# EAGLE board ATmega128RFA1-DevBoard-Panel-v23 (EAGLE 6.4), part 1 of 2
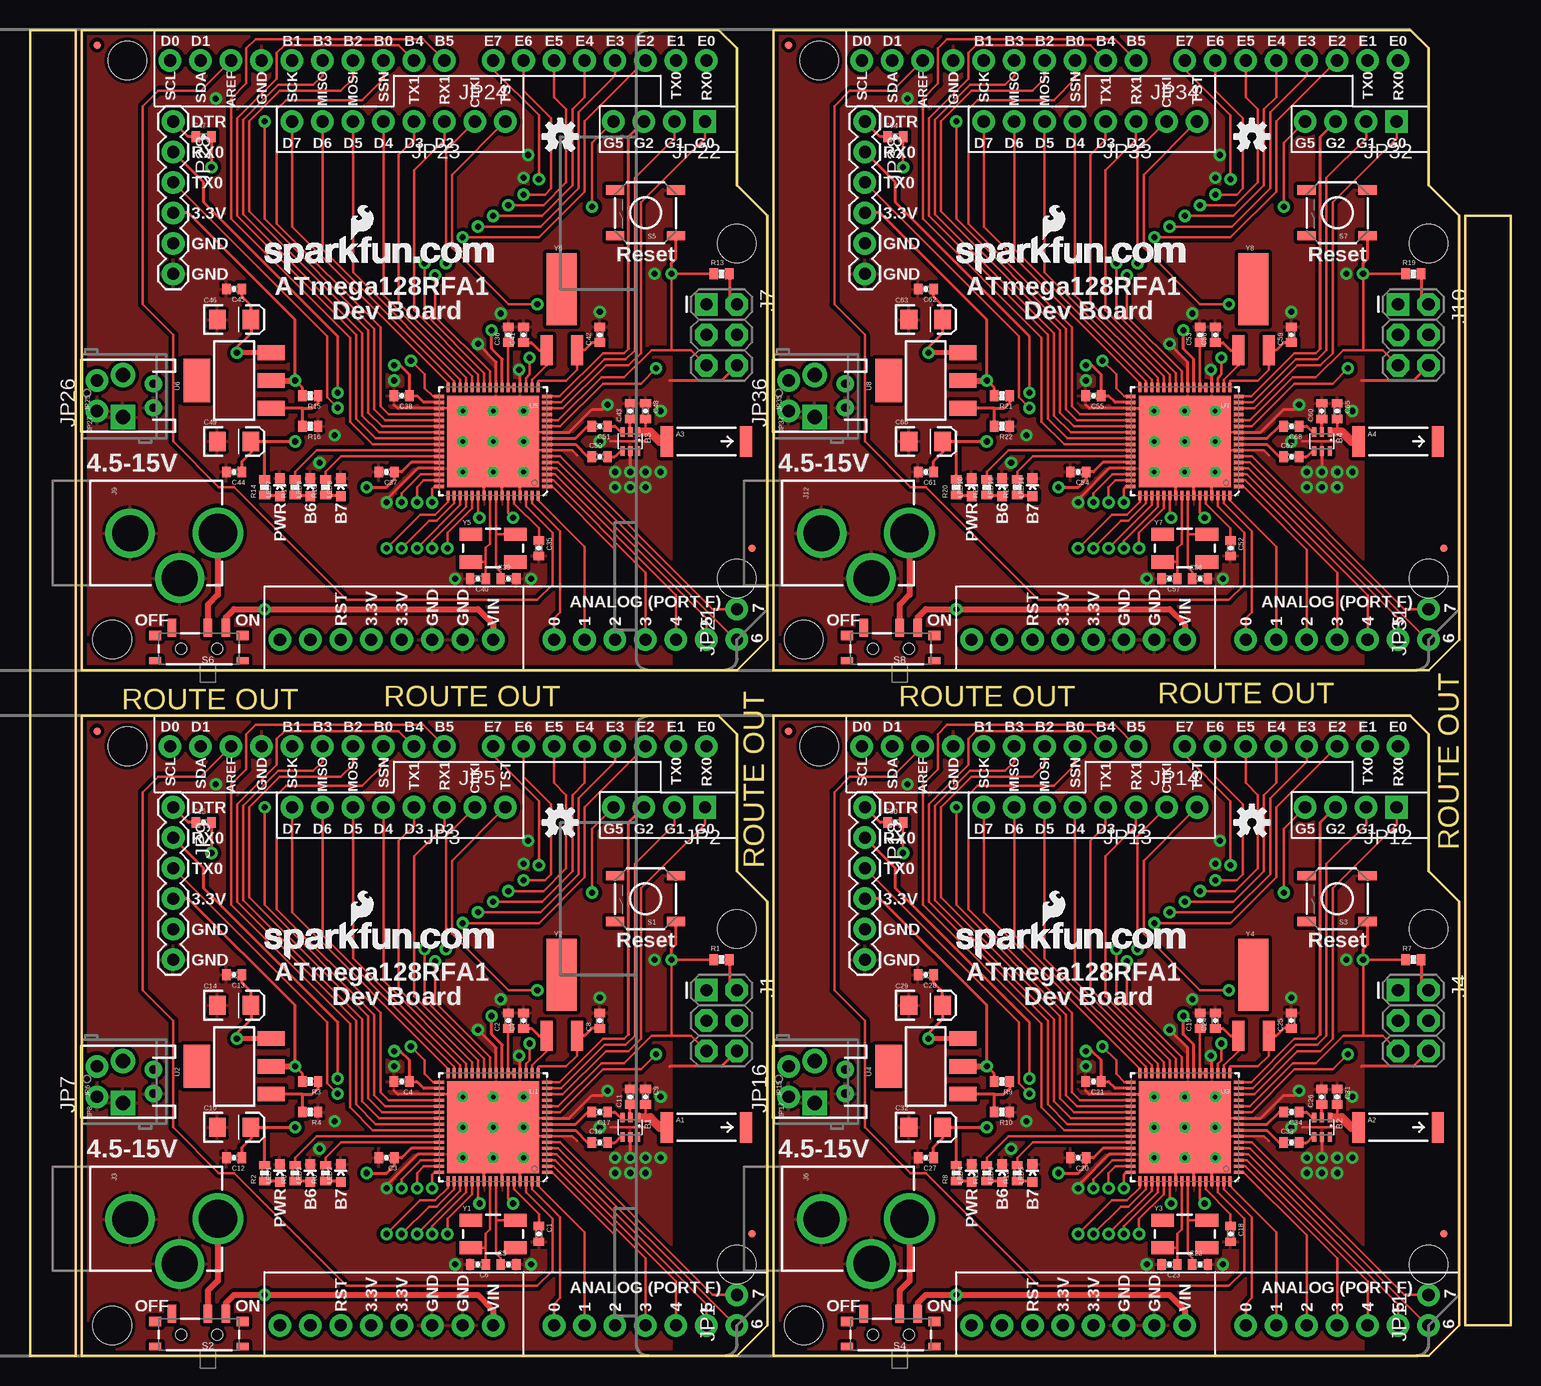
[diagram p0: board, top side]
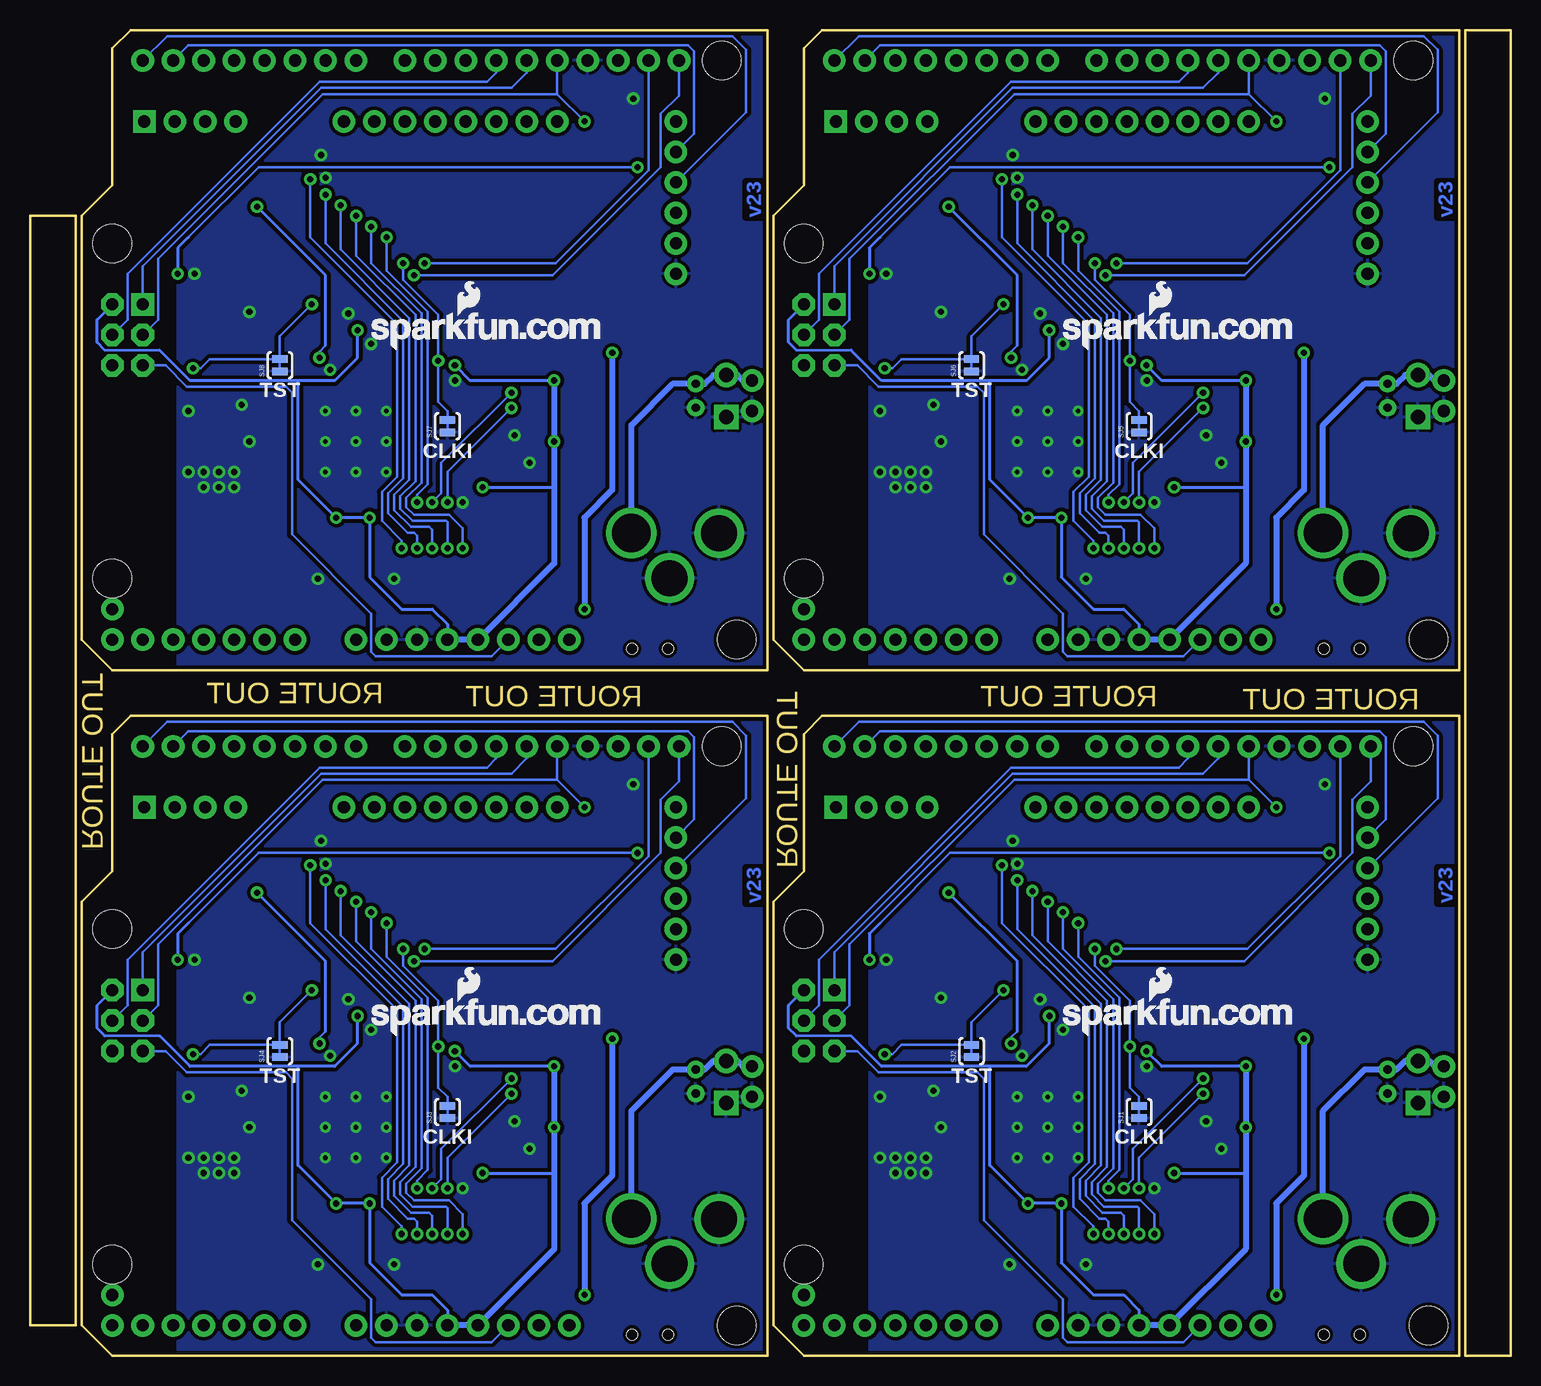
[diagram p1: board, bottom side, seen from below]

Size 123.44 x 110.49 mm. Coordinates in mm from the lower left corner, seen from the top.
Outline: 3.81,88.9 3.81,0 0,0 0,22.86
Outline: 123.44,88.9 123.44,2.54 119.63,2.54 119.63,22.86
Outline: 119.63,6.1 119.63,95 123.44,95 123.44,72.14
Outline: 0,107.95 0,88.9
Outline: 0,88.9 0,21.59
Outline: 0,88.9 0,110.49 3.81,110.49 3.81,87.63
Outline: 4.32,53.34 4.32,0 58.93,0 61.47,2.54 61.47,37.85 58.93,40.39 58.93,51.82 57.4,53.34 4.32,53.34
Outline: 61.98,53.34 61.98,0 116.59,0 119.13,2.54 119.13,37.85 116.59,40.39 116.59,51.82 115.06,53.34 61.98,53.34
Outline: 4.32,110.49 4.32,57.15 58.93,57.15 61.47,59.69 61.47,95 58.93,97.54 58.93,108.97 57.4,110.49 4.32,110.49
Outline: 61.98,110.49 61.98,57.15 116.59,57.15 119.13,59.69 119.13,95 116.59,97.54 116.59,108.97 115.06,110.49 61.98,110.49
Copper layers (1*16): Top 0.035mm / dielectric 1.5mm / Bottom 0.035mm
Design rules "SparkFun": minimum track width 7mil, minimum drill 15mil, track to track 8mil, track to pad 8mil, pad to pad 8mil, via to via 8mil, smd to smd 8mil, copper to edge 8mil, drill to drill 8mil, minimum pad ring 12mil, minimum via ring 10mil, stop-mask expansion 4mil, vias tented up to drill 20mil, thermal gap 10mil

## Footprints (pad centres in the part's own frame; a part is rotated, then mirrored left to right if it is on the bottom)
ANTENNA-CHIP5 = smd 1.016 x 2.54: FEED -3.302,0; NC 3.302,0
BALUN = smd 0.35 x 0.8: 1 -0.65,-0.8; 2 0,-0.8; 3 0.65,-0.8; 4 0.65,0.8; 5 0,0.8; 6 -0.65,0.8
0402-CAP = smd 0.7 x 0.9: 1 -0.65,0; 2 0.65,0
EIA3216 = smd 1.4 x 1.6: A 1.4,0; C -1.4,0
MICRO-FIDUCIAL = smd 0.635 x 0.635: 1 0,0
2X3-NS = drill 1.016 pad 1.88 square: 1 -2.54,-1.27 | drill 1.016 pad 1.88 octagon: 2 -2.54,1.27; 3 0,-1.27; 4 0,1.27; 5 2.54,-1.27; 6 2.54,1.27
ARDUINO_UNO_R3 = drill 1.016 pad 1.88: 3.3V 35.56,2.54; 5V 38.1,2.54; A0 50.8,2.54; A1 53.34,2.54; A2 55.88,2.54; A3 58.42,2.54; A4 60.96,2.54; A5 63.5,2.54; AREF 23.876,50.8; D2 58.42,50.8; D3 55.88,50.8; D4 53.34,50.8; D5 50.8,50.8; D6 48.26,50.8; D7 45.72,50.8; D8 41.656,50.8; D9 39.116,50.8; D10 36.576,50.8; D11 34.036,50.8; D12 31.496,50.8; D13 28.956,50.8; GND@0 40.64,2.54; GND@1 43.18,2.54; GND@2 26.416,50.8; IOREF 30.48,2.54; NC 27.94,2.54; RES 33.02,2.54; RX 63.5,50.8; SCL 18.796,50.8; SDA 21.336,50.8; TX 60.96,50.8; VIN 45.72,2.54 | hole 3.2: 15.24,50.8; 13.97,2.54; 66.04,7.62; 66.04,35.56
POWER_JACK_PTH_LOCK = drill 2.997 pad 4.115: GND 0.025,6.557; GNDBREAK 3.762,10.7 | drill 3.2 pad 4.115: PWR 0,13.878
1X02_NO_SILK = drill 1.016 pad 1.88: 1 0,0; 2 2.54,0
1X04_NO_SILK = drill 1.016 pad 1.88 square: 1 0,0 | drill 1.016 pad 1.88: 2 2.54,0; 3 5.08,0; 4 7.62,0
1X06_NS = drill 1.016 pad 1.88: 1 0,0; 2 2.54,0; 3 5.08,0; 4 7.62,0; 5 10.16,0; 6 12.7,0
JST-2-PTH = drill 0.7 pad 1.448: 1 -1,0; 2 1,0
SCREWTERMINAL-3.5MM-2-NS = drill 1.2 pad 2.032 square: 1 0,0 | drill 1.2 pad 2.032: 2 3.5,0
FTDI_BASIC = drill 1.016 pad 1.88: CTS 10.16,0; DTR 0,0; GND 12.7,0; RXI 2.54,0; TXO 5.08,0; VCC 7.62,0
LED-0603 = smd 0.8 x 0.8: A 0,-0.75; C 0,0.75
0402-RES = smd 0.7 x 0.9: 1 -0.65,0; 2 0.65,0
TACTILE_SWITCH_SMD = smd 1.524 x 0.762: 1 -2.54,1.905; 2 2.54,1.905; 3 -2.54,-1.905; 4 2.54,-1.905
SWITCH-SPST-SMD-A = smd 0.7 x 1.5: 1 -2.25,-1.75; 2 -0.75,-1.75; 3 2.25,-1.75 | smd 1 x 0.6: GND1 -3.65,1; GND3 3.65,1 | smd 1 x 0.8: GND2 -3.65,-1.1; GND4 3.65,-1.1 | hole 0.9: -1.5,0; 1.5,0
SJ_2S-TRACE = smd 0.635 x 1.27: 1 -0.508,0; 2 0.508,0
QFN-64 = smd 0.8 x 0.28: 1 -4.5,3.75; 2 -4.5,3.25; 3 -4.5,2.75; 4 -4.5,2.25; 5 -4.5,1.75; 6 -4.5,1.25; 7 -4.5,0.75; 8 -4.5,0.25; 9 -4.5,-0.25; 10 -4.5,-0.75; 11 -4.5,-1.25; 12 -4.5,-1.75; 13 -4.5,-2.25; 14 -4.5,-2.75; 15 -4.5,-3.25; 16 -4.5,-3.75; 33 4.5,-3.75; 34 4.5,-3.25; 35 4.5,-2.75; 36 4.5,-2.25; 37 4.5,-1.75; 38 4.5,-1.25; 39 4.5,-0.75; 40 4.5,-0.25; 41 4.5,0.25; 42 4.5,0.75; 43 4.5,1.25; 44 4.5,1.75; 45 4.5,2.25; 46 4.5,2.75; 47 4.5,3.25; 48 4.5,3.75 | smd 0.28 x 0.8: 17 -3.75,-4.5; 18 -3.25,-4.5; 19 -2.75,-4.5; 20 -2.25,-4.5; 21 -1.75,-4.5; 22 -1.25,-4.5; 23 -0.75,-4.5; 24 -0.25,-4.5; 25 0.25,-4.5; 26 0.75,-4.5; 27 1.25,-4.5; 28 1.75,-4.5; 29 2.25,-4.5; 30 2.75,-4.5; 31 3.25,-4.5; 32 3.75,-4.5; 49 3.75,4.5; 50 3.25,4.5; 51 2.75,4.5; 52 2.25,4.5; 53 1.75,4.5; 54 1.25,4.5; 55 0.75,4.5; 56 0.25,4.5; 57 -0.25,4.5; 58 -0.75,4.5; 59 -1.25,4.5; 60 -1.75,4.5; 61 -2.25,4.5; 62 -2.75,4.5; 63 -3.25,4.5; 64 -3.75,4.5 | smd 7.65 x 7.65: 65 0,0
SOT223 = smd 1.219 x 2.235: 1 -2.311,-3.099; 2 0,-3.099; 3 2.311,-3.099 | smd 3.6 x 2.2: 4 0,3.099
CRYSTAL-SMD-5X3 = smd 1.9 x 1.1: 1 -1.85,-1.15; 2 1.85,-1.15; 3 1.85,1.15; 4 -1.85,1.15
CRYSTAL-32KHZ-SMD = smd 2.5 x 6: SHEILD 0,5.08 | smd 1 x 2.5: X1 -1.27,0; X2 1.27,0

## Placement (x,y rotation side)
A1  ANTENNA2SMD5  [ANTENNA-CHIP5]  56.39,19.05 0 top
A2  ANTENNA2SMD5  [ANTENNA-CHIP5]  114.05,19.05 0 top
A3  ANTENNA2SMD5  [ANTENNA-CHIP5]  56.39,76.2 0 top
A4  ANTENNA2SMD5  [ANTENNA-CHIP5]  114.05,76.2 0 top
B1  748421245  [BALUN]  50.04,19.05 180 top
B2  748421245  [BALUN]  107.7,19.05 180 top
B3  748421245  [BALUN]  50.04,76.2 180 top
B4  748421245  [BALUN]  107.7,76.2 180 top
C1  1uF  [0402-CAP]  42.42,10.16 270 top
C2  1uF  [0402-CAP]  39.88,27.94 90 top
C3  1uF  [0402-CAP]  29.72,16.51 180 top
C4  1uF  [0402-CAP]  30.99,22.86 180 top
C5  12pF  [0402-CAP]  39.88,7.62 0 top
C6  12pF  [0402-CAP]  37.34,7.62 180 top
C7  12pF  [0402-CAP]  41.15,27.94 90 top
C8  12pF  [0402-CAP]  47.5,27.94 90 top
C9  0.75pF  [0402-CAP]  51.31,21.59 270 top
C10  10uF  [EIA3216]  17.02,19.05 0 top
C11  22pF  [0402-CAP]  50.04,21.59 90 top
C12  1uF  [0402-CAP]  17.02,16.51 180 top
C13  0.1uF  [0402-CAP]  17.02,31.75 180 top
C14  10uF  [EIA3216]  17.02,29.21 0 top
C15  0.1uF  [0402-CAP]  14.48,44.45 0 top
C16  JUMP  [0402-CAP]  47.5,17.78 0 top
C17  JUMP  [0402-CAP]  47.5,20.32 180 top
C18  1uF  [0402-CAP]  100.08,10.16 270 top
C19  1uF  [0402-CAP]  97.54,27.94 90 top
C20  1uF  [0402-CAP]  87.38,16.51 180 top
C21  1uF  [0402-CAP]  88.65,22.86 180 top
C22  12pF  [0402-CAP]  97.54,7.62 0 top
C23  12pF  [0402-CAP]  95,7.62 180 top
C24  12pF  [0402-CAP]  98.81,27.94 90 top
C25  12pF  [0402-CAP]  105.16,27.94 90 top
C26  22pF  [0402-CAP]  107.7,21.59 90 top
C27  1uF  [0402-CAP]  74.68,16.51 180 top
C28  0.1uF  [0402-CAP]  74.68,31.75 180 top
C29  10uF  [EIA3216]  74.68,29.21 0 top
C30  0.1uF  [0402-CAP]  72.14,44.45 0 top
C31  0.75pF  [0402-CAP]  108.97,21.59 270 top
C32  10uF  [EIA3216]  74.68,19.05 0 top
C33  JUMP  [0402-CAP]  105.16,17.78 0 top
C34  JUMP  [0402-CAP]  105.16,20.32 180 top
C35  1uF  [0402-CAP]  42.42,67.31 270 top
C36  1uF  [0402-CAP]  39.88,85.09 90 top
C37  1uF  [0402-CAP]  29.72,73.66 180 top
C38  1uF  [0402-CAP]  30.99,80.01 180 top
C39  12pF  [0402-CAP]  39.88,64.77 0 top
C40  12pF  [0402-CAP]  37.34,64.77 180 top
C41  12pF  [0402-CAP]  41.15,85.09 90 top
C42  12pF  [0402-CAP]  47.5,85.09 90 top
C43  22pF  [0402-CAP]  50.04,78.74 90 top
C44  1uF  [0402-CAP]  17.02,73.66 180 top
C45  0.1uF  [0402-CAP]  17.02,88.9 180 top
C46  10uF  [EIA3216]  17.02,86.36 0 top
C47  0.1uF  [0402-CAP]  14.48,101.6 0 top
C48  0.75pF  [0402-CAP]  51.31,78.74 270 top
C49  10uF  [EIA3216]  17.02,76.2 0 top
C50  JUMP  [0402-CAP]  47.5,74.93 0 top
C51  JUMP  [0402-CAP]  47.5,77.47 180 top
C52  1uF  [0402-CAP]  100.08,67.31 270 top
C53  1uF  [0402-CAP]  97.54,85.09 90 top
C54  1uF  [0402-CAP]  87.38,73.66 180 top
C55  1uF  [0402-CAP]  88.65,80.01 180 top
C56  12pF  [0402-CAP]  97.54,64.77 0 top
C57  12pF  [0402-CAP]  95,64.77 180 top
C58  12pF  [0402-CAP]  98.81,85.09 90 top
C59  12pF  [0402-CAP]  105.16,85.09 90 top
C60  22pF  [0402-CAP]  107.7,78.74 90 top
C61  1uF  [0402-CAP]  74.68,73.66 180 top
C62  0.1uF  [0402-CAP]  74.68,88.9 180 top
C63  10uF  [EIA3216]  74.68,86.36 0 top
C64  0.1uF  [0402-CAP]  72.14,101.6 0 top
C65  0.75pF  [0402-CAP]  108.97,78.74 270 top
C66  10uF  [EIA3216]  74.68,76.2 0 top
C67  JUMP  [0402-CAP]  105.16,74.93 0 top
C68  JUMP  [0402-CAP]  105.16,77.47 180 top
FID1  FIDUCIALUFIDUCIAL  [MICRO-FIDUCIAL]  5.59,52.07 0 top
FID2  FIDUCIALUFIDUCIAL  [MICRO-FIDUCIAL]  60.2,10.16 0 top
FID3  FIDUCIALUFIDUCIAL  [MICRO-FIDUCIAL]  63.25,52.07 0 top
FID4  FIDUCIALUFIDUCIAL  [MICRO-FIDUCIAL]  117.86,10.16 0 top
FID5  FIDUCIALUFIDUCIAL  [MICRO-FIDUCIAL]  5.59,109.22 0 top
FID6  FIDUCIALUFIDUCIAL  [MICRO-FIDUCIAL]  60.2,67.31 0 top
FID7  FIDUCIALUFIDUCIAL  [MICRO-FIDUCIAL]  63.25,109.22 0 top
FID8  FIDUCIALUFIDUCIAL  [MICRO-FIDUCIAL]  117.86,67.31 0 top
J1  ISP  [2X3-NS]  57.66,27.94 270 top
J2  ARDUINO_UNO_R3  [ARDUINO_UNO_R3]  -7.11,0 0 top
J3  POWER_JACKPTH_LOCK  [POWER_JACK_PTH_LOCK]  1.78,11.43 270 top
J4  ISP  [2X3-NS]  115.32,27.94 270 top
J5  ARDUINO_UNO_R3  [ARDUINO_UNO_R3]  50.55,0 0 top
J6  POWER_JACKPTH_LOCK  [POWER_JACK_PTH_LOCK]  59.44,11.43 270 top
J7  ISP  [2X3-NS]  57.66,85.09 270 top
J8  ARDUINO_UNO_R3  [ARDUINO_UNO_R3]  -7.11,57.15 0 top
J9  POWER_JACKPTH_LOCK  [POWER_JACK_PTH_LOCK]  1.78,68.58 270 top
J10  ISP  [2X3-NS]  115.32,85.09 270 top
J11  ARDUINO_UNO_R3  [ARDUINO_UNO_R3]  50.55,57.15 0 top
J12  POWER_JACKPTH_LOCK  [POWER_JACK_PTH_LOCK]  59.44,68.58 270 top
JP1  [1X02_NO_SILK]  58.93,2.54 90 top
JP2  [1X04_NO_SILK]  56.26,45.72 180 top
JP3  [1X06_NS]  34.54,45.72 180 top
JP4  LOGO-SFENEW  [SFE-NEW-WEBLOGO]  37.34,26.67 0 bottom
JP5  [1X02_NO_SILK]  37.08,45.72 0 top
JP6  [JST-2-PTH]  10.29,22.86 90 top
JP7  [1X02_NO_SILK]  5.59,21.59 90 top
JP8  [SCREWTERMINAL-3.5MM-2-NS]  7.75,21.08 90 top
JP9  FTDI  [FTDI_BASIC]  11.94,45.72 270 top
JP10  LOGO-SFENEW  [SFE-NEW-WEBLOGO]  19.56,33.02 0 top
JP11  [1X02_NO_SILK]  116.59,2.54 90 top
JP12  [1X04_NO_SILK]  113.92,45.72 180 top
JP13  [1X06_NS]  92.2,45.72 180 top
JP14  [1X02_NO_SILK]  94.74,45.72 0 top
JP15  [JST-2-PTH]  67.95,22.86 90 top
JP16  [1X02_NO_SILK]  63.25,21.59 90 top
JP17  [SCREWTERMINAL-3.5MM-2-NS]  65.41,21.08 90 top
JP18  FTDI  [FTDI_BASIC]  69.6,45.72 270 top
JP19  LOGO-SFENEW  [SFE-NEW-WEBLOGO]  77.22,33.02 0 top
JP20  LOGO-SFENEW  [SFE-NEW-WEBLOGO]  95,26.67 0 bottom
JP21  [1X02_NO_SILK]  58.93,59.69 90 top
JP22  [1X04_NO_SILK]  56.26,102.87 180 top
JP23  [1X06_NS]  34.54,102.87 180 top
JP24  [1X02_NO_SILK]  37.08,102.87 0 top
JP25  [JST-2-PTH]  10.29,80.01 90 top
JP26  [1X02_NO_SILK]  5.59,78.74 90 top
JP27  [SCREWTERMINAL-3.5MM-2-NS]  7.75,78.23 90 top
JP28  FTDI  [FTDI_BASIC]  11.94,102.87 270 top
JP29  LOGO-SFENEW  [SFE-NEW-WEBLOGO]  19.56,90.17 0 top
JP30  LOGO-SFENEW  [SFE-NEW-WEBLOGO]  37.34,83.82 0 bottom
JP31  [1X02_NO_SILK]  116.59,59.69 90 top
JP32  [1X04_NO_SILK]  113.92,102.87 180 top
JP33  [1X06_NS]  92.2,102.87 180 top
JP34  [1X02_NO_SILK]  94.74,102.87 0 top
JP35  [JST-2-PTH]  67.95,80.01 90 top
JP36  [1X02_NO_SILK]  63.25,78.74 90 top
JP37  [SCREWTERMINAL-3.5MM-2-NS]  65.41,78.23 90 top
JP38  FTDI  [FTDI_BASIC]  69.6,102.87 270 top
JP39  LOGO-SFENEW  [SFE-NEW-WEBLOGO]  77.22,90.17 0 top
JP40  LOGO-SFENEW  [SFE-NEW-WEBLOGO]  95,83.82 0 bottom
LED1  RED  [LED-0603]  20.83,15.24 0 top
LED2  GREEN  [LED-0603]  25.91,15.24 0 top
LED3  GREEN  [LED-0603]  23.37,15.24 0 top
LED4  RED  [LED-0603]  78.49,15.24 0 top
LED5  GREEN  [LED-0603]  83.57,15.24 0 top
LED6  GREEN  [LED-0603]  81.03,15.24 0 top
LED7  RED  [LED-0603]  20.83,72.39 0 top
LED8  GREEN  [LED-0603]  25.91,72.39 0 top
LED9  GREEN  [LED-0603]  23.37,72.39 0 top
LED10  RED  [LED-0603]  78.49,72.39 0 top
LED11  GREEN  [LED-0603]  83.57,72.39 0 top
LED12  GREEN  [LED-0603]  81.03,72.39 0 top
R1  10k  [0402-RES]  57.66,33.02 0 top
R2  1k  [0402-RES]  19.56,15.24 90 top
R3  240  [0402-RES]  23.37,22.86 180 top
R4  390  [0402-RES]  23.37,20.32 180 top
R5  330  [0402-RES]  22.1,15.24 90 top
R6  330  [0402-RES]  24.64,15.24 90 top
R7  10k  [0402-RES]  115.32,33.02 0 top
R8  1k  [0402-RES]  77.22,15.24 90 top
R9  240  [0402-RES]  81.03,22.86 180 top
R10  390  [0402-RES]  81.03,20.32 180 top
R11  330  [0402-RES]  79.76,15.24 90 top
R12  330  [0402-RES]  82.3,15.24 90 top
R13  10k  [0402-RES]  57.66,90.17 0 top
R14  1k  [0402-RES]  19.56,72.39 90 top
R15  240  [0402-RES]  23.37,80.01 180 top
R16  390  [0402-RES]  23.37,77.47 180 top
R17  330  [0402-RES]  22.1,72.39 90 top
R18  330  [0402-RES]  24.64,72.39 90 top
R19  10k  [0402-RES]  115.32,90.17 0 top
R20  1k  [0402-RES]  77.22,72.39 90 top
R21  240  [0402-RES]  81.03,80.01 180 top
R22  390  [0402-RES]  81.03,77.47 180 top
R23  330  [0402-RES]  79.76,72.39 90 top
R24  330  [0402-RES]  82.3,72.39 90 top
S1  [TACTILE_SWITCH_SMD]  51.31,38.1 180 top
S2  [SWITCH-SPST-SMD-A]  14.1,1.78 180 top
S3  [TACTILE_SWITCH_SMD]  108.97,38.1 180 top
S4  [SWITCH-SPST-SMD-A]  71.75,1.78 180 top
S5  [TACTILE_SWITCH_SMD]  51.31,95.25 180 top
S6  [SWITCH-SPST-SMD-A]  14.1,58.93 180 top
S7  [TACTILE_SWITCH_SMD]  108.97,95.25 180 top
S8  [SWITCH-SPST-SMD-A]  71.75,58.93 180 top
SJ1  [SJ_2S-TRACE]  30.99,20.32 90 bottom
SJ2  [SJ_2S-TRACE]  44.96,25.4 90 bottom
SJ3  [SJ_2S-TRACE]  88.65,20.32 90 bottom
SJ4  [SJ_2S-TRACE]  102.62,25.4 90 bottom
SJ5  [SJ_2S-TRACE]  30.99,77.47 90 bottom
SJ6  [SJ_2S-TRACE]  44.96,82.55 90 bottom
SJ7  [SJ_2S-TRACE]  88.65,77.47 90 bottom
SJ8  [SJ_2S-TRACE]  102.62,82.55 90 bottom
U1  ATMEGA128RFA1  [QFN-64]  38.61,19.05 180 top
U2  LM1117  [SOT223]  17.02,24.13 90 top
U3  ATMEGA128RFA1  [QFN-64]  96.27,19.05 180 top
U4  LM1117  [SOT223]  74.68,24.13 90 top
U5  ATMEGA128RFA1  [QFN-64]  38.61,76.2 180 top
U6  LM1117  [SOT223]  17.02,81.28 90 top
U7  ATMEGA128RFA1  [QFN-64]  96.27,76.2 180 top
U8  LM1117  [SOT223]  74.68,81.28 90 top
U$1  OSHW-LOGOS  [OSHW-LOGO-S]  44.2,44.45 0 top
U$2  OSHW-LOGOS  [OSHW-LOGO-S]  101.85,44.45 0 top
U$3  OSHW-LOGOS  [OSHW-LOGO-S]  44.2,101.6 0 top
U$4  OSHW-LOGOS  [OSHW-LOGO-S]  101.85,101.6 0 top
Y1  16MHz  [CRYSTAL-SMD-5X3]  38.61,10.16 0 top
Y2  32.768kHz  [CRYSTAL-32KHZ-SMD]  44.32,26.67 0 top
Y3  16MHz  [CRYSTAL-SMD-5X3]  96.27,10.16 0 top
Y4  32.768kHz  [CRYSTAL-32KHZ-SMD]  101.98,26.67 0 top
Y5  16MHz  [CRYSTAL-SMD-5X3]  38.61,67.31 0 top
Y6  32.768kHz  [CRYSTAL-32KHZ-SMD]  44.32,83.82 0 top
Y7  16MHz  [CRYSTAL-SMD-5X3]  96.27,67.31 0 top
Y8  32.768kHz  [CRYSTAL-32KHZ-SMD]  101.98,83.82 0 top

## Library data of the parts
A1-A4 B1-B4 = SparkFun-RF
C1-C15 C18-C32 C35-C49 C52-C66 R1 R2 R7 R8 R13 R14 R19 R20 SJ1-SJ8 = SparkFun-Passives
C16 C17 C33 C34 C50 C51 C67 C68 R3-R6 R9-R12 R15-R18 R21-R24 S2 S4 S6 S8 U2 U4 U6 U8 = SparkFun
FID1-FID8 JP4 JP10 JP19 JP20 JP29 JP30 JP39 JP40 U$1-U$4 = SparkFun-Aesthetics
J1 J3 J4 J6 J7 J9 J10 J12 JP1-JP3 JP5-JP9 JP11-JP18 JP21-JP28 JP31-JP38 = SparkFun-Connectors
J2 J5 J8 J11 = SparkFun-Boards
LED1-LED12 = SparkFun-LED
S1 S3 S5 S7 = SparkFun-Electromechanical
U1 U3 U5 U7 = SparkFun-DigitalIC
Y1-Y8 = SparkFun-FreqCtrl

## Nets
3.3V: C3.1 C4.1 C10.A C12.1 J1.2 J2.3.3V J2.5V JP9.VCC R1.2 R2.2 R3.2 U1.23 U1.34 U1.44 U1.54 U1.59 U2.2
3.3V1: C20.1 C21.1 C27.1 C32.A J4.2 J5.3.3V J5.5V JP18.VCC R7.2 R8.2 R9.2 U3.23 U3.34 U3.44 U3.54 U3.59 U4.2
3.3V2: C37.1 C38.1 C44.1 C49.A J7.2 J8.3.3V J8.5V JP28.VCC R13.2 R14.2 R15.2 U5.23 U5.34 U5.44 U5.54 U5.59 U6.2
3.3V3: C54.1 C55.1 C61.1 C66.A J10.2 J11.3.3V J11.5V JP38.VCC R19.2 R20.2 R21.2 U7.23 U7.34 U7.44 U7.54 U7.59 U8.2
A0: J2.A0 U1.63
A1: J2.A1 U1.64
A2: J2.A2 U1.1
A3: J2.A3 U1.2
A4: J2.A4 U1.3
A5: J2.A5 U1.4
A6: JP1.1 U1.5
A7: JP1.2 U1.6
A8: J5.A0 U3.63
A9: J5.A1 U3.64
A10: J5.A2 U3.1
A11: J5.A3 U3.2
A12: J5.A4 U3.3
A13: J5.A5 U3.4
A14: JP11.1 U3.5
A15: JP11.2 U3.6
A16: J8.A0 U5.63
A17: J8.A1 U5.64
A18: J8.A2 U5.1
A19: J8.A3 U5.2
A20: J8.A4 U5.3
A21: J8.A5 U5.4
A22: JP21.1 U5.5
A23: JP21.2 U5.6
A24: J11.A0 U7.63
A25: J11.A1 U7.64
A26: J11.A2 U7.1
A27: J11.A3 U7.2
A28: J11.A4 U7.3
A29: J11.A5 U7.4
A30: JP31.1 U7.5
A31: JP31.2 U7.6
AREF: J2.AREF U1.62
AREF1: J5.AREF U3.62
AREF2: J8.AREF U5.62
AREF3: J11.AREF U7.62
AVDD: C1.1 U1.60
AVDD1: C18.1 U3.60
AVDD2: C35.1 U5.60
AVDD3: C52.1 U7.60
CLKI: JP5.1 SJ1.2 U1.33
CLKI1: JP14.1 SJ3.2 U3.33
CLKI2: JP24.1 SJ5.2 U5.33
CLKI3: JP34.1 SJ7.2 U7.33
DTR: C15.1 JP9.DTR
DTR1: C30.1 JP18.DTR
DTR2: C47.1 JP28.DTR
DTR3: C64.1 JP38.DTR
DVDD: C2.1 U1.21 U1.22
DVDD1: C19.1 U3.21 U3.22
DVDD2: C36.1 U5.21 U5.22
DVDD3: C53.1 U7.21 U7.22
FB: R3.1 R4.2 U2.1
FB1: R9.1 R10.2 U4.1
FB2: R15.1 R16.2 U6.1
FB3: R21.1 R22.2 U8.1
GND: B1.5 C1.2 C2.2 C3.2 C4.2 C5.2 C6.2 C7.2 C8.2 C9.1 C10.C C11.2 C12.2 C13.2 C14.C J1.6 J2.GND@0 J2.GND@1 J2.GND@2 J3.GND J3.GNDBREAK JP6.1 JP7.1 JP8.1 JP9.GND LED1.C LED2.C LED3.C R4.1 S1.3 SJ1.1 SJ2.1 U1.7 U1.10 U1.20 U1.24 U1.35 U1.45 U1.55 U1.58 U1.61 U1.65
GND1: B2.5 C18.2 C19.2 C20.2 C21.2 C22.2 C23.2 C24.2 C25.2 C26.2 C27.2 C28.2 C29.C C31.1 C32.C J4.6 J5.GND@0 J5.GND@1 J5.GND@2 J6.GND J6.GNDBREAK JP15.1 JP16.1 JP17.1 JP18.GND LED4.C LED5.C LED6.C R10.1 S3.3 SJ3.1 SJ4.1 U3.7 U3.10 U3.20 U3.24 U3.35 U3.45 U3.55 U3.58 U3.61 U3.65
GND2: B3.5 C35.2 C36.2 C37.2 C38.2 C39.2 C40.2 C41.2 C42.2 C43.2 C44.2 C45.2 C46.C C48.1 C49.C J7.6 J8.GND@0 J8.GND@1 J8.GND@2 J9.GND J9.GNDBREAK JP25.1 JP26.1 JP27.1 JP28.GND LED7.C LED8.C LED9.C R16.1 S5.3 SJ5.1 SJ6.1 U5.7 U5.10 U5.20 U5.24 U5.35 U5.45 U5.55 U5.58 U5.61 U5.65
GND3: B4.5 C52.2 C53.2 C54.2 C55.2 C56.2 C57.2 C58.2 C59.2 C60.2 C61.2 C62.2 C63.C C65.1 C66.C J10.6 J11.GND@0 J11.GND@1 J11.GND@2 J12.GND J12.GNDBREAK JP35.1 JP36.1 JP37.1 JP38.GND LED10.C LED11.C LED12.C R22.1 S7.3 SJ7.1 SJ8.1 U7.7 U7.10 U7.20 U7.24 U7.35 U7.45 U7.55 U7.58 U7.61 U7.65
MISO: J1.1 J2.D12 U1.39
MISO1: J4.1 J5.D12 U3.39
MISO2: J7.1 J8.D12 U5.39
MISO3: J10.1 J11.D12 U7.39
MOSI: J1.4 J2.D11 U1.38
MOSI1: J4.4 J5.D11 U3.38
MOSI2: J7.4 J8.D11 U5.38
MOSI3: J10.4 J11.D11 U7.38
N$1: C22.1 U3.57 Y3.3
N$2: LED1.A R2.1
N$3: C5.1 U1.57 Y1.3
N$4: C6.1 U1.56 Y1.1
N$5: C7.1 U1.18 Y2.X1
N$6: C8.1 U1.17 Y2.X2
N$7: B1.2 C11.1
N$8: LED3.A R5.1
N$9: J3.PWR JP6.2 JP7.2 JP8.2 S2.2
N$10: B1.4 C16.2
N$11: B1.3 C17.1
N$12: C23.1 U3.56 Y3.1
N$13: LED2.A R6.1
N$14: C24.1 U3.18 Y4.X1
N$15: C25.1 U3.17 Y4.X2
N$16: LED4.A R8.1
N$17: B2.2 C26.1
N$18: B2.4 C33.2
N$19: B2.3 C34.1
N$20: LED6.A R11.1
N$21: LED5.A R12.1
N$22: J6.PWR JP15.2 JP16.2 JP17.2 S4.2
N$23: C39.1 U5.57 Y5.3
N$24: C40.1 U5.56 Y5.1
N$25: C41.1 U5.18 Y6.X1
N$26: C42.1 U5.17 Y6.X2
N$27: LED7.A R14.1
N$28: B3.2 C43.1
N$29: B3.4 C50.2
N$30: B3.3 C51.1
N$31: LED9.A R17.1
N$32: LED8.A R18.1
N$33: J9.PWR JP25.2 JP26.2 JP27.2 S6.2
N$34: C56.1 U7.57 Y7.3
N$35: C57.1 U7.56 Y7.1
N$36: C58.1 U7.18 Y8.X1
N$37: C59.1 U7.17 Y8.X2
N$38: LED10.A R20.1
N$39: B4.2 C60.1
N$40: B4.4 C67.2
N$41: B4.3 C68.1
N$42: LED12.A R23.1
N$43: LED11.A R24.1
N$44: J12.PWR JP35.2 JP36.2 JP37.2 S8.2
PB1: R12.2 U3.43
PB2: R11.2 U3.42
PB3: J5.D8 U3.41
PB4: J2.D9 U1.40
PB5: J2.D8 U1.41
PB6: R5.2 U1.42
PB7: R6.2 U1.43
PB8: J5.D9 U3.40
PB9: R18.2 U5.43
PB10: R17.2 U5.42
PB11: J8.D8 U5.41
PB12: J8.D9 U5.40
PB13: R24.2 U7.43
PB14: R23.2 U7.42
PB15: J11.D8 U7.41
PB16: J11.D9 U7.40
PD1: JP13.6 U3.32
PD2: JP13.5 U3.31
PD3: JP13.4 U3.30
PD4: JP3.3 U1.29
PD5: JP3.4 U1.30
PD6: JP3.5 U1.31
PD7: JP3.6 U1.32
PD8: JP13.3 U3.29
PD9: JP23.6 U5.32
PD10: JP23.5 U5.31
PD11: JP23.4 U5.30
PD12: JP23.3 U5.29
PD13: JP33.6 U7.32
PD14: JP33.5 U7.31
PD15: JP33.4 U7.30
PD16: JP33.3 U7.29
PE1: J5.D7 U3.53
PE2: J2.D2 U1.48
PE3: J2.D3 U1.49
PE4: J2.D4 U1.50
PE5: J2.D5 U1.51
PE6: J2.D6 U1.52
PE7: J2.D7 U1.53
PE8: J5.D6 U3.52
PE9: J5.D5 U3.51
PE10: J5.D4 U3.50
PE11: J5.D3 U3.49
PE12: J5.D2 U3.48
PE13: J8.D7 U5.53
PE14: J8.D6 U5.52
PE15: J8.D5 U5.51
PE16: J8.D4 U5.50
PE17: J8.D3 U5.49
PE18: J8.D2 U5.48
PE19: J11.D7 U7.53
PE20: J11.D6 U7.52
PE21: J11.D5 U7.51
PE22: J11.D4 U7.50
PE23: J11.D3 U7.49
PE24: J11.D2 U7.48
PG0: JP2.1 U1.14
PG1: JP2.2 U1.15
PG2: JP2.3 U1.16
PG3: JP12.4 U3.19
PG4: JP12.3 U3.16
PG5: JP2.4 U1.19
PG6: JP12.2 U3.15
PG7: JP12.1 U3.14
PG8: JP22.4 U5.19
PG9: JP22.3 U5.16
PG10: JP22.2 U5.15
PG11: JP22.1 U5.14
PG12: JP32.4 U7.19
PG13: JP32.3 U7.16
PG14: JP32.2 U7.15
PG15: JP32.1 U7.14
RESET: C15.2 J1.5 J2.RES R1.1 S1.1 U1.12
RESET1: C30.2 J4.5 J5.RES R7.1 S3.1 U3.12
RESET2: C47.2 J7.5 J8.RES R13.1 S5.1 U5.12
RESET3: C64.2 J10.5 J11.RES R19.1 S7.1 U7.12
RFANT: A1.FEED B1.1 C9.2
RFANT1: A2.FEED B2.1 C31.2
RFANT2: A3.FEED B3.1 C48.2
RFANT3: A4.FEED B4.1 C65.2
RFN: C17.2 U1.9
RFN1: C34.2 U3.9
RFN2: C51.2 U5.9
RFN3: C68.2 U7.9
RFP: C16.1 U1.8
RFP1: C33.1 U3.8
RFP2: C50.1 U5.8
RFP3: C67.1 U7.8
RSTON: U1.13
RSTON1: U3.13
RSTON2: U5.13
RSTON3: U7.13
RX0: J2.RX JP9.TXO U1.46
RX1: JP3.1 U1.27
RX2: J5.RX JP18.TXO U3.46
RX3: JP13.1 U3.27
RX4: J8.RX JP28.TXO U5.46
RX5: JP23.1 U5.27
RX6: J11.RX JP38.TXO U7.46
RX7: JP33.1 U7.27
SCK: J1.3 J2.D13 U1.37
SCK1: J4.3 J5.D13 U3.37
SCK2: J7.3 J8.D13 U5.37
SCK3: J10.3 J11.D13 U7.37
SCL: J2.SCL U1.25
SCL1: J5.SCL U3.25
SCL2: J8.SCL U5.25
SCL3: J11.SCL U7.25
SDA: J2.SDA U1.26
SDA1: J5.SDA U3.26
SDA2: J8.SDA U5.26
SDA3: J11.SDA U7.26
SSN: J2.D10 U1.36
SSN1: J5.D10 U3.36
SSN2: J8.D10 U5.36
SSN3: J11.D10 U7.36
TST: JP5.2 SJ2.2 U1.11
TST1: JP14.2 SJ4.2 U3.11
TST2: JP24.2 SJ6.2 U5.11
TST3: JP34.2 SJ8.2 U7.11
TX0: J2.TX JP9.RXI U1.47
TX1: JP3.2 U1.28
TX2: J5.TX JP18.RXI U3.47
TX3: JP13.2 U3.28
TX4: J8.TX JP28.RXI U5.47
TX5: JP23.2 U5.28
TX6: J11.TX JP38.RXI U7.47
TX7: JP33.2 U7.28
VCC: C13.1 C14.A J2.VIN S2.1 U2.3
VCC1: C28.1 C29.A J5.VIN S4.1 U4.3
VCC2: C45.1 C46.A J8.VIN S6.1 U6.3
VCC3: C62.1 C63.A J11.VIN S8.1 U8.3